# Altium PCB PHOTODIODE_V1.3.0.PcbDoc (part 1 of 3)
Units mm, origin at the board's own origin, x right, y up, seen from the top; angles counter-clockwise.
Board outline 86 x 86 mm, 4 copper layers (L1_TOP, L2_GND, L3_SIGNAL, L4_BOT); 134 components, 78 nets, 520 pads, 1315 vias.
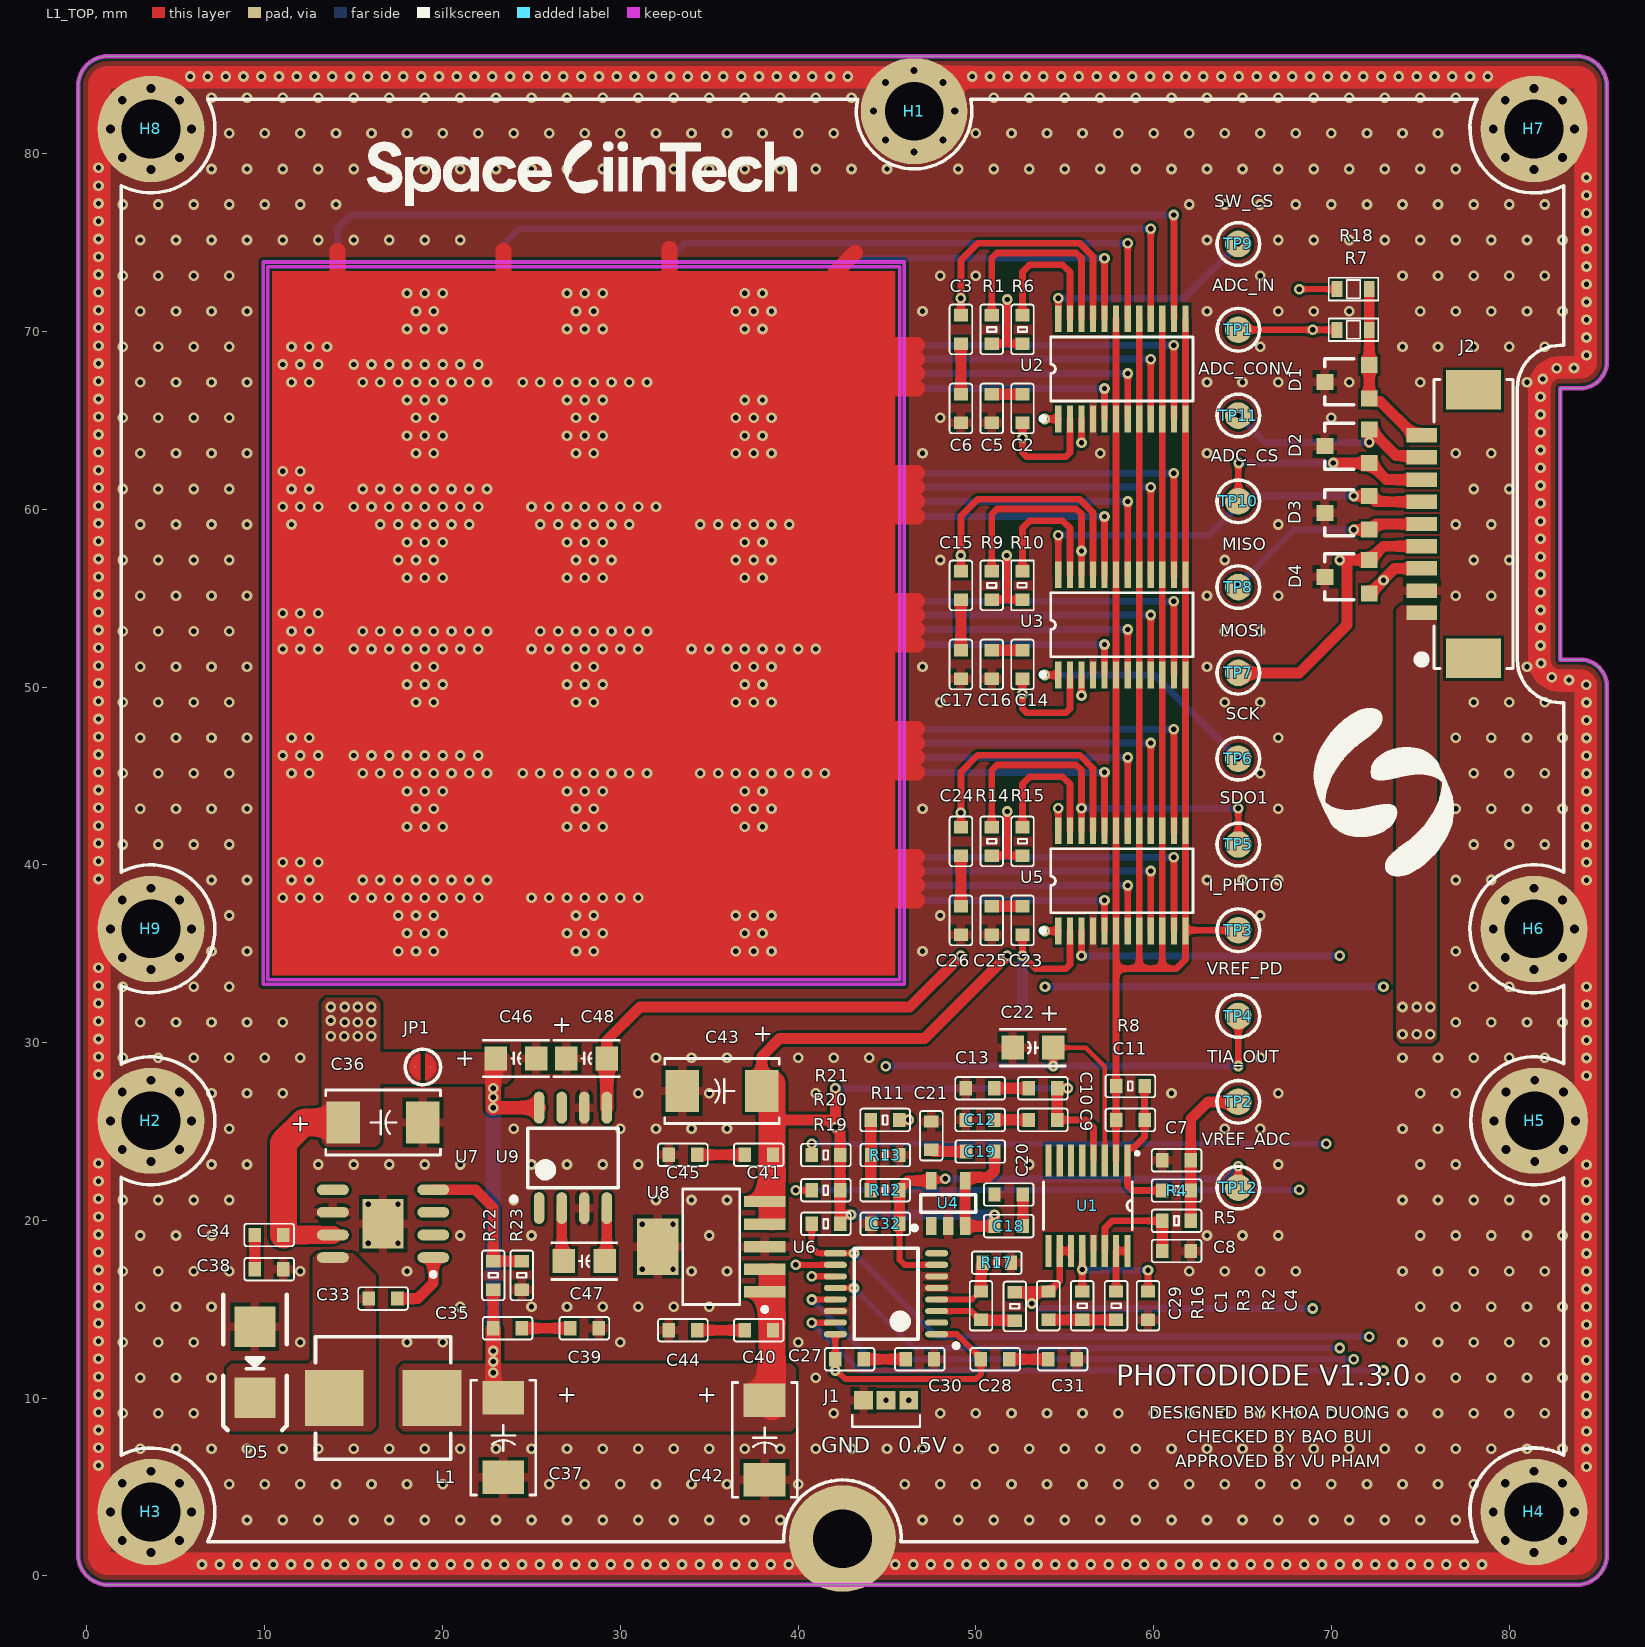
[diagram p0: L1_TOP view]
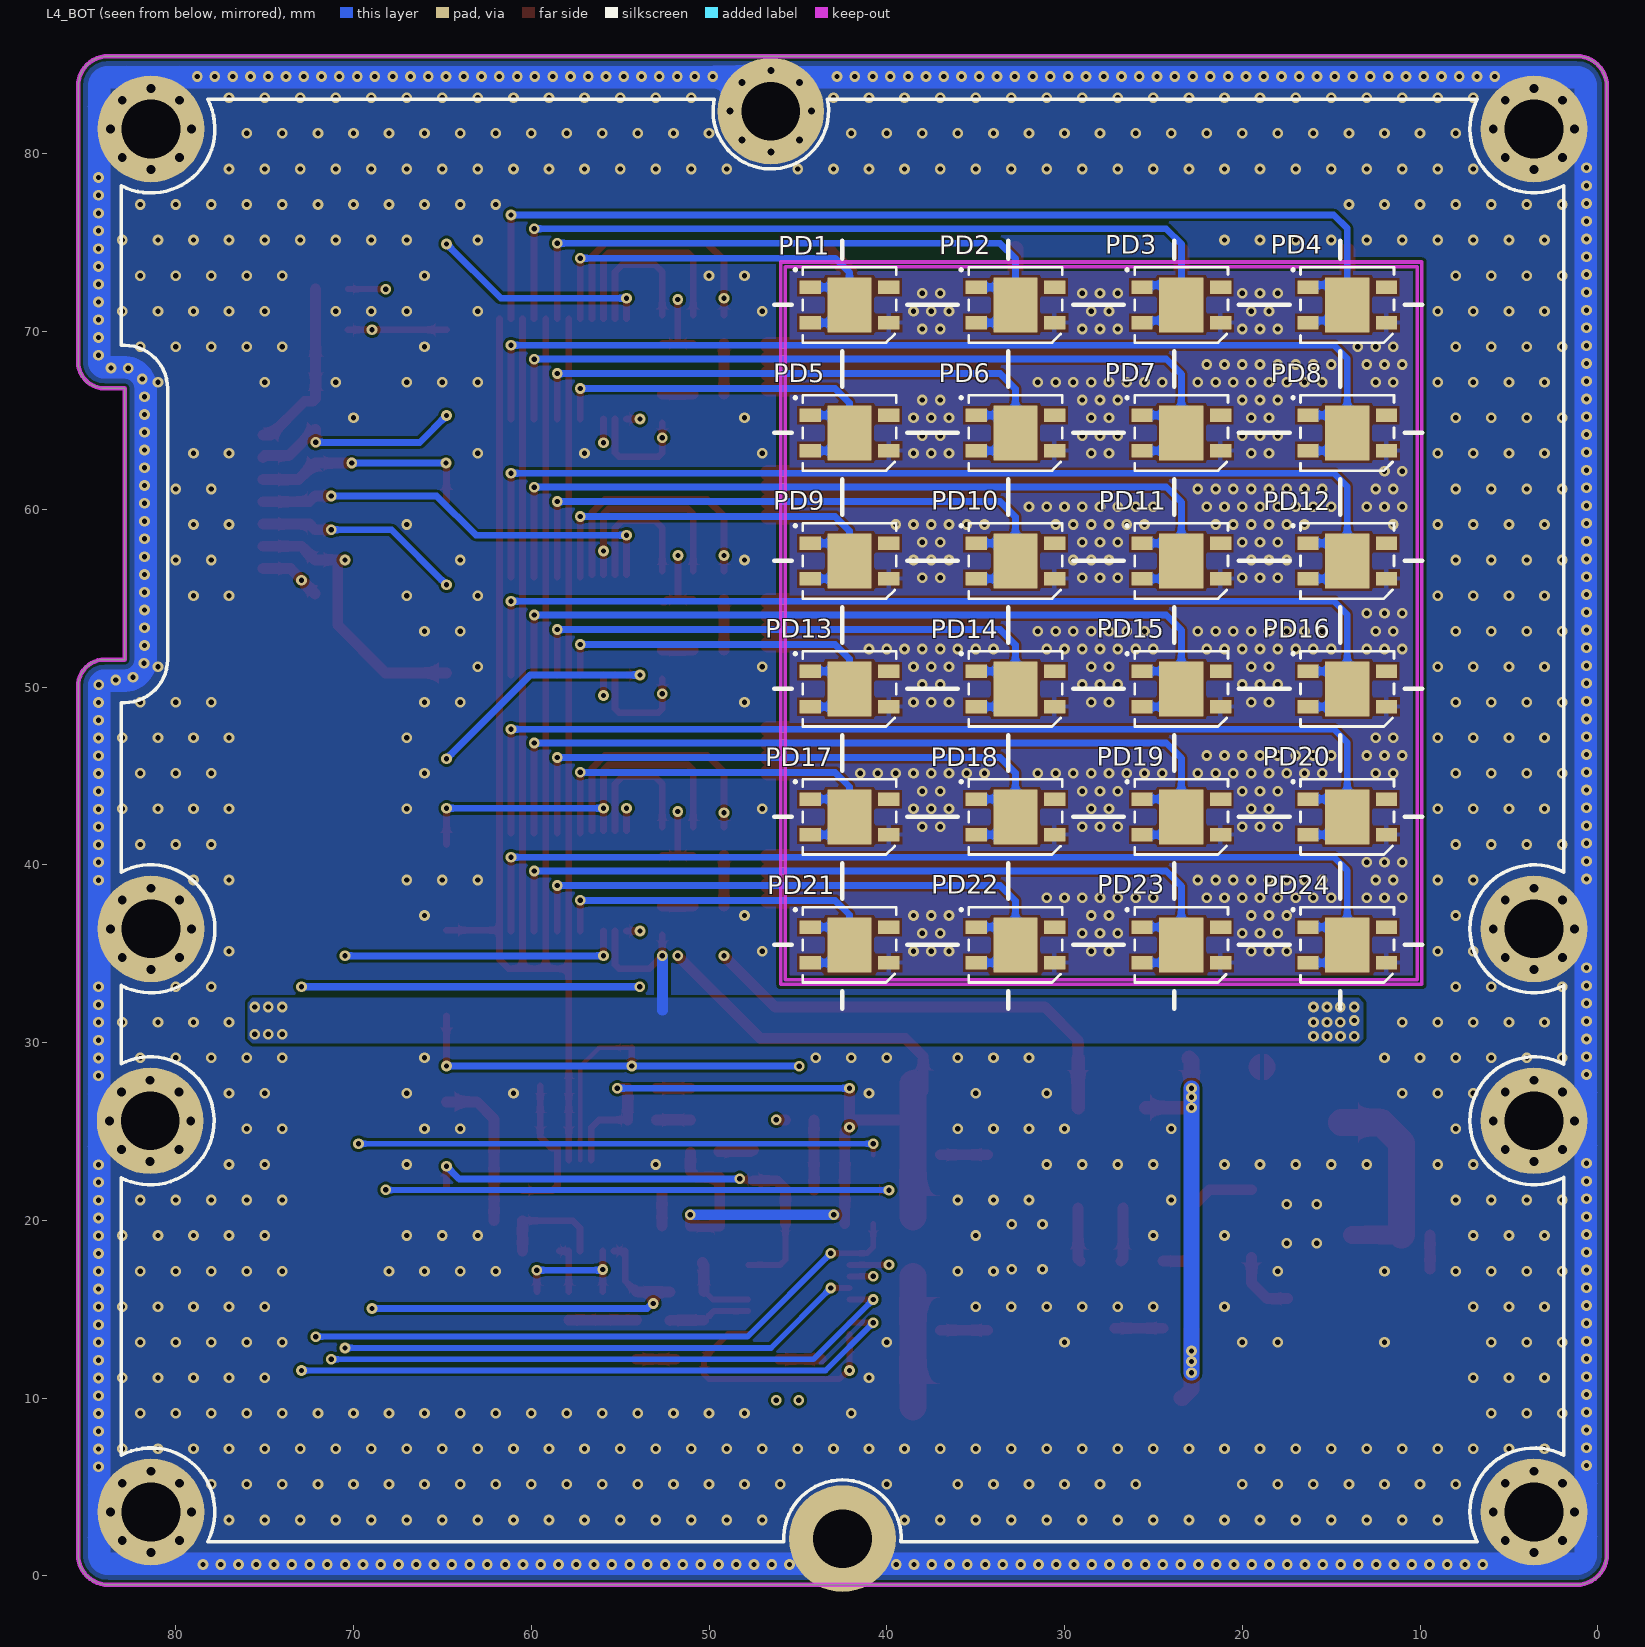
[diagram p1: L4_BOT view, seen from below]
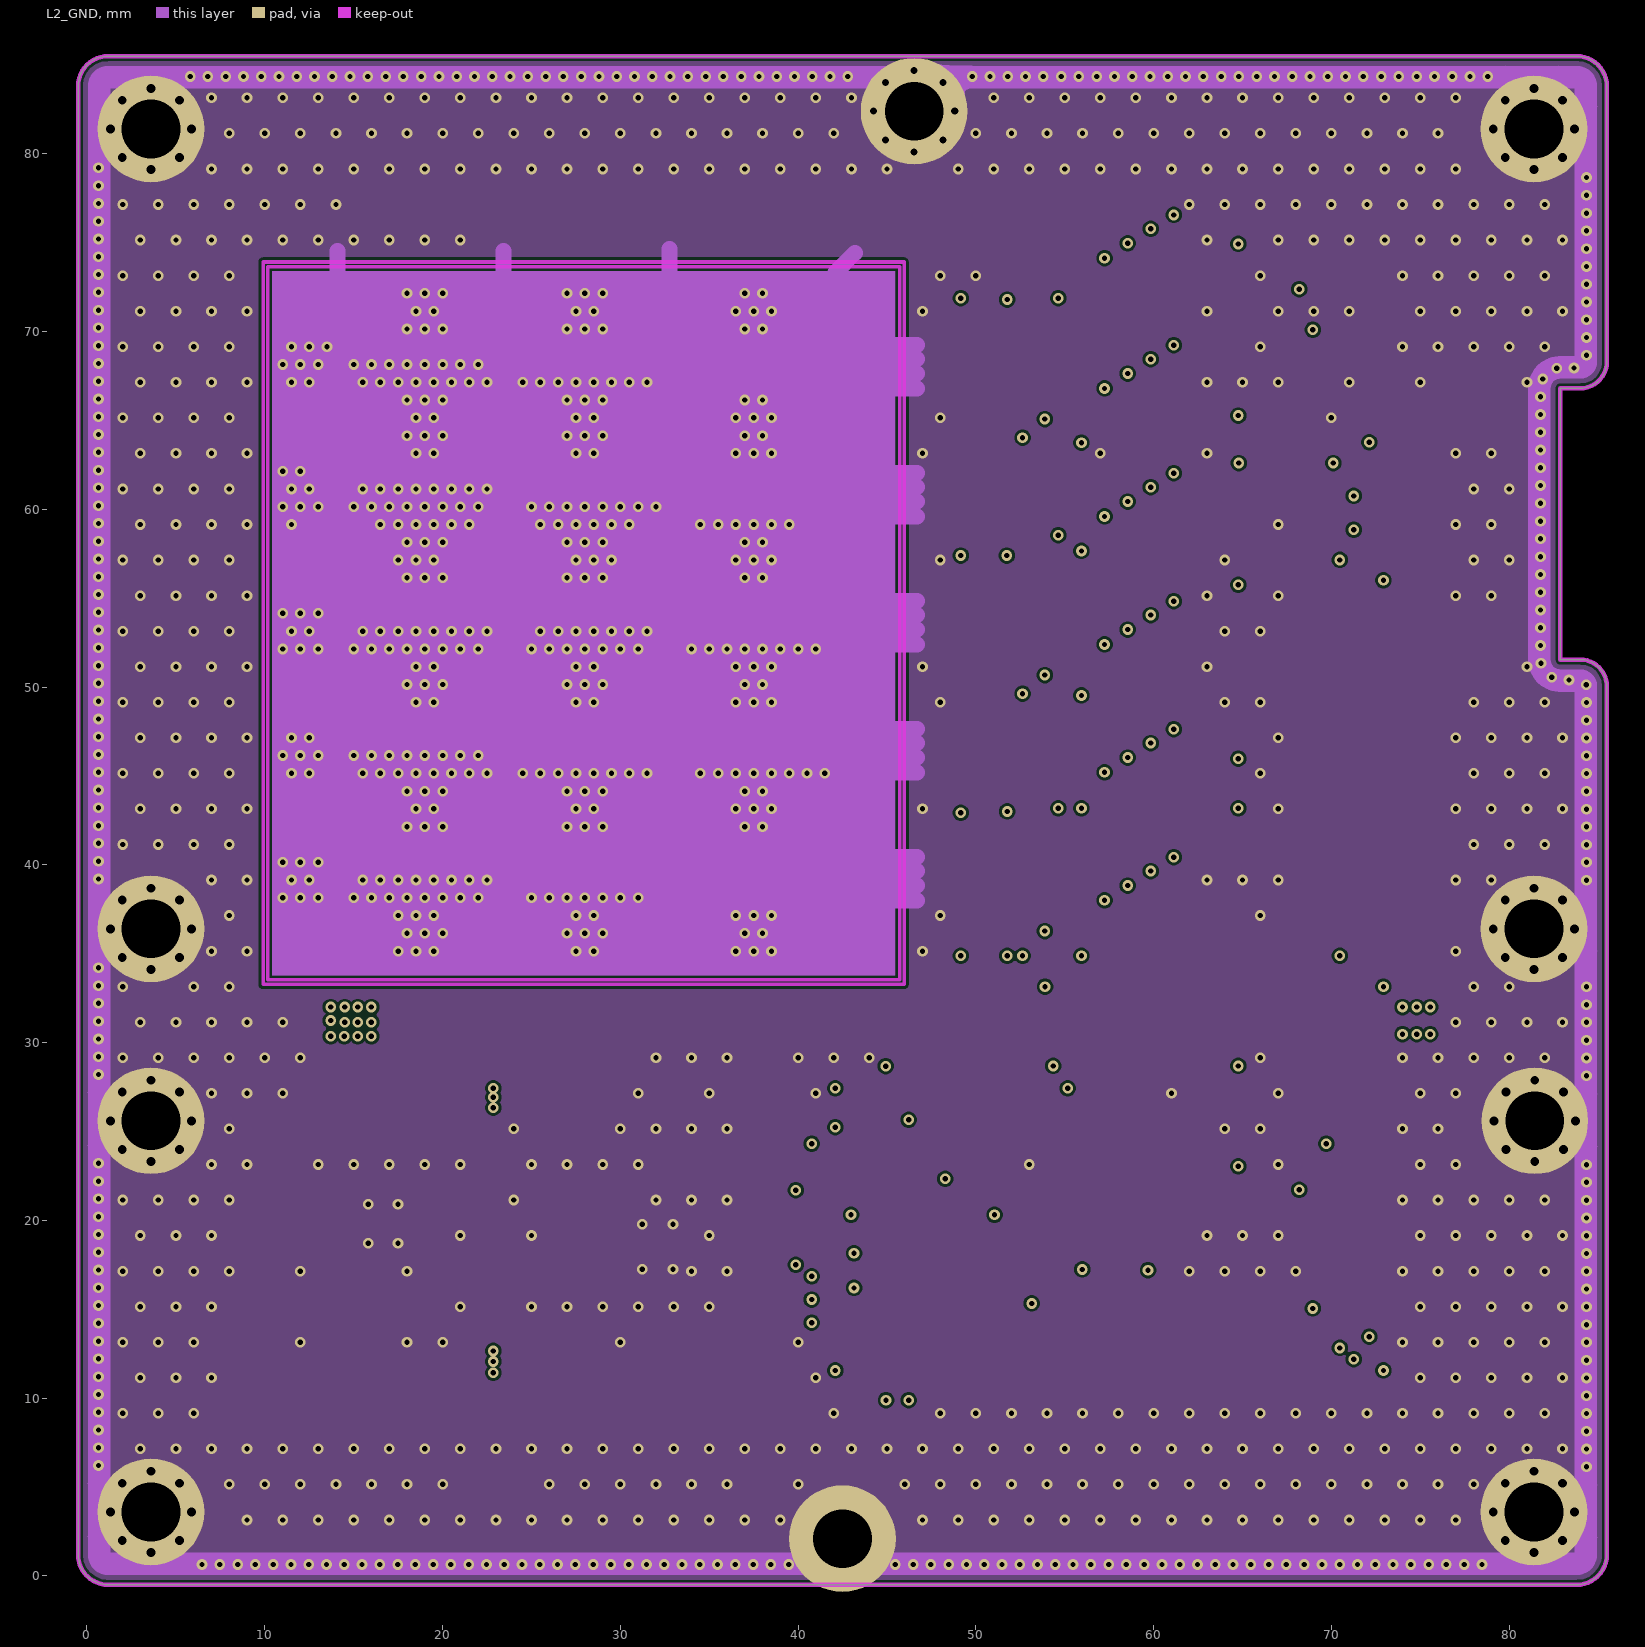
[diagram p2: L2_GND]
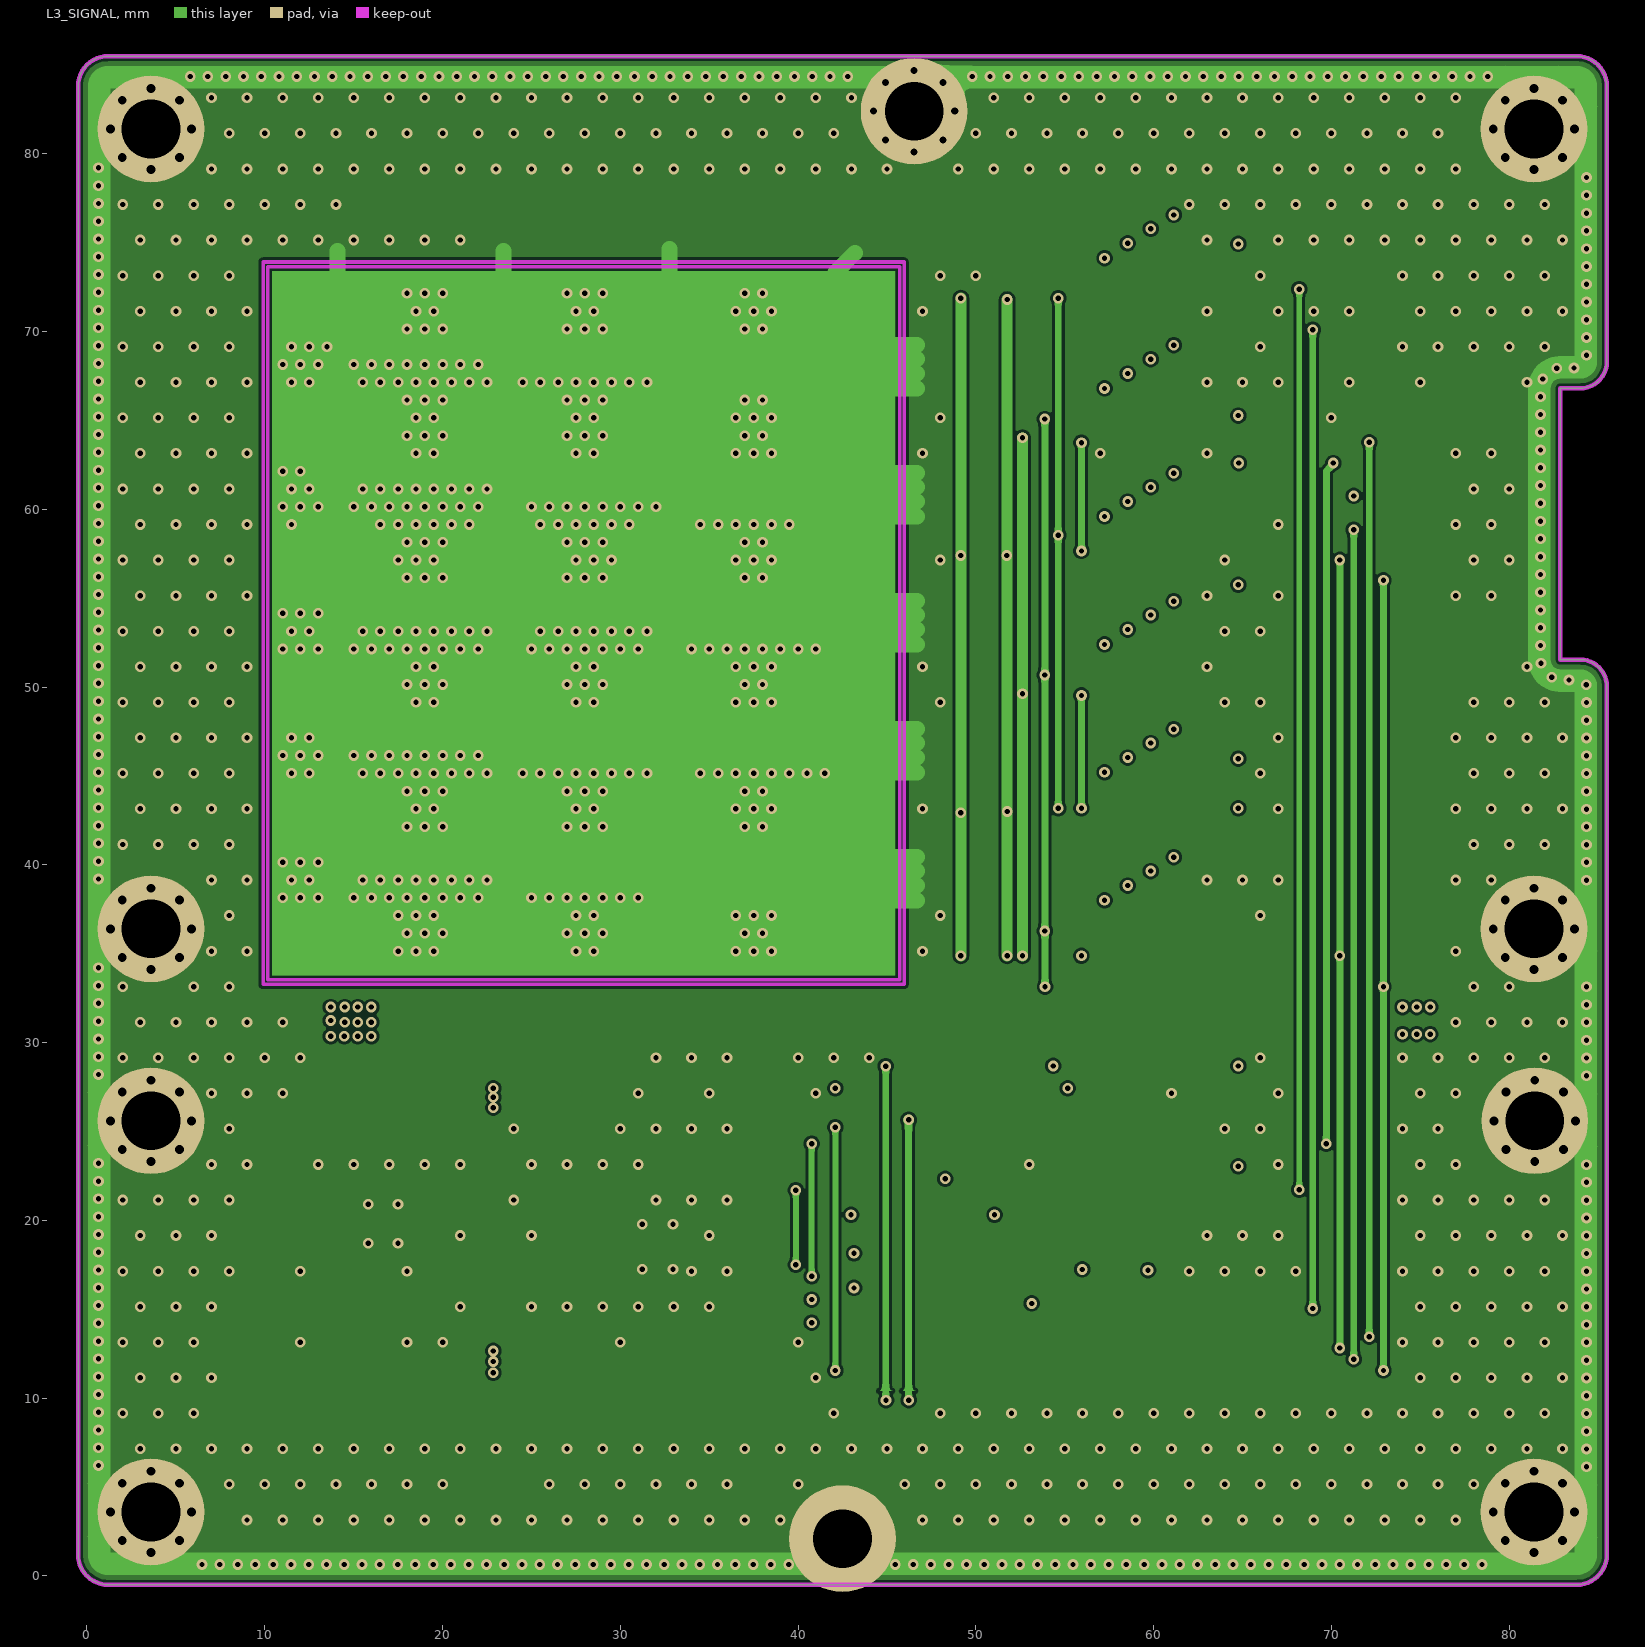
[diagram p3: L3_SIGNAL]
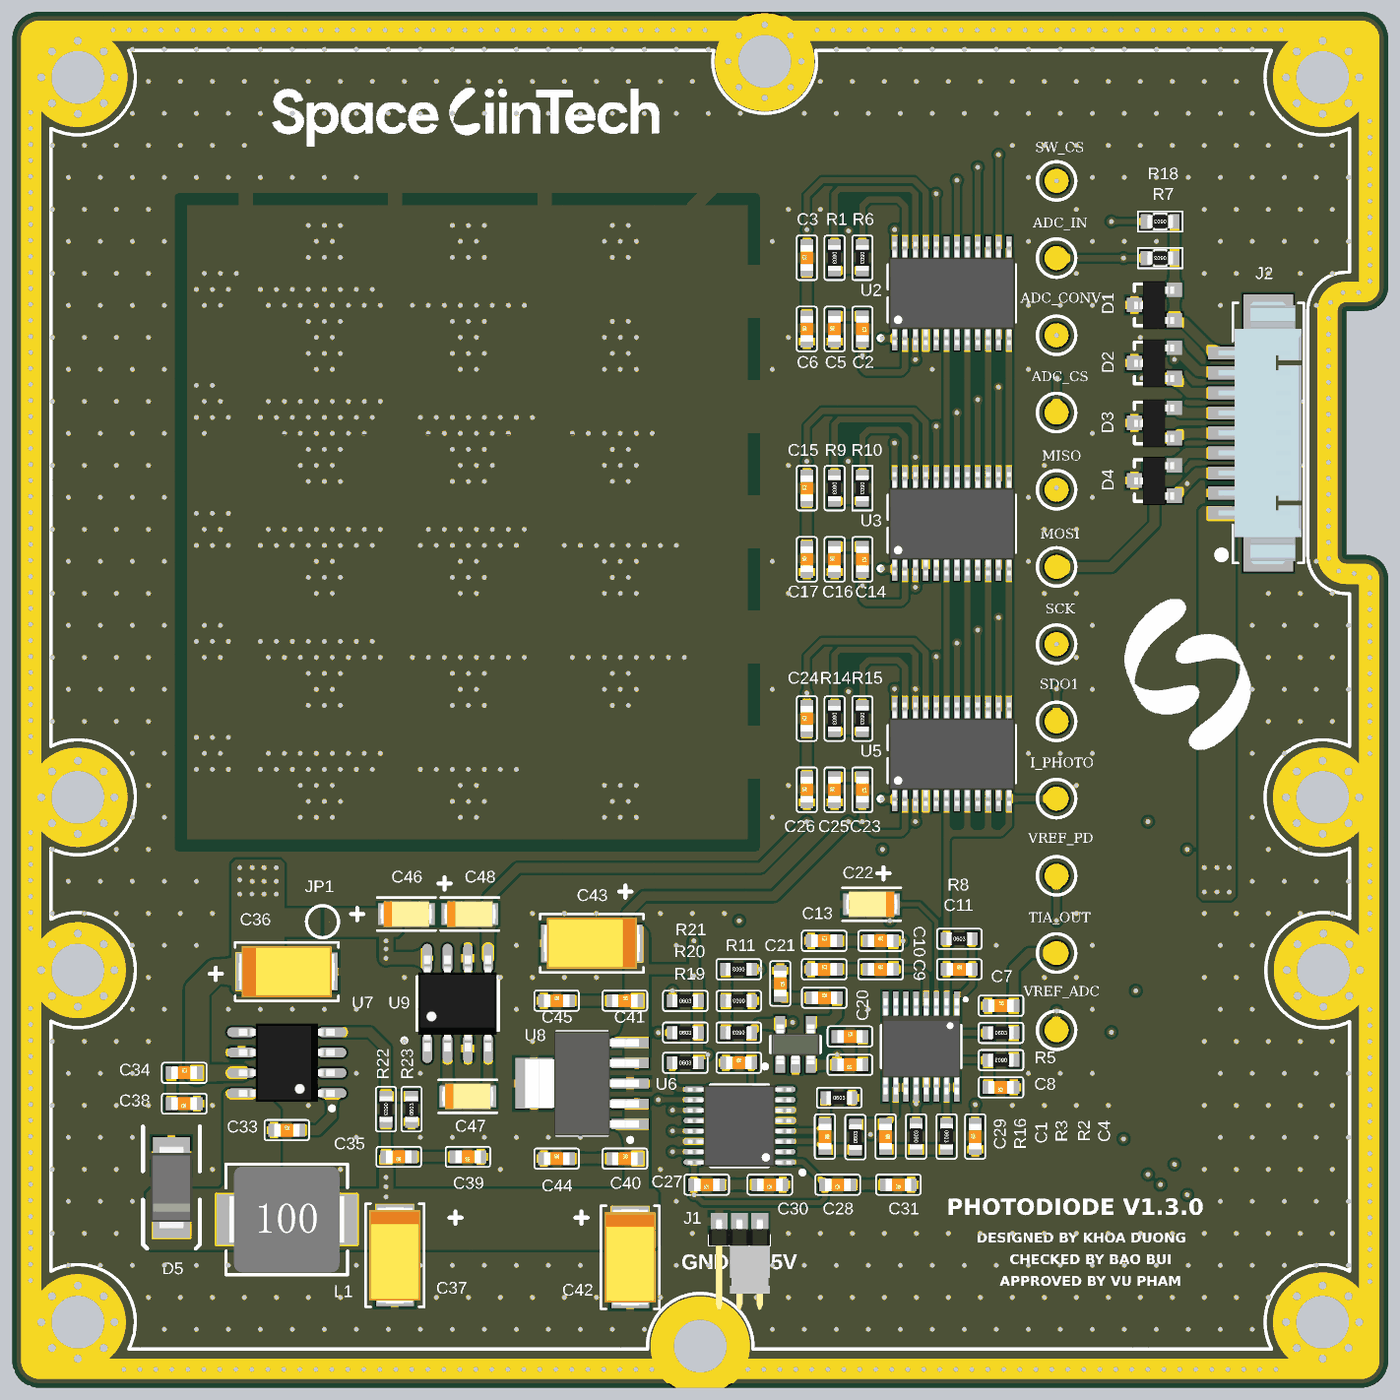
[diagram p6: 3D render of the assembled board from above, using the file's embedded part models]
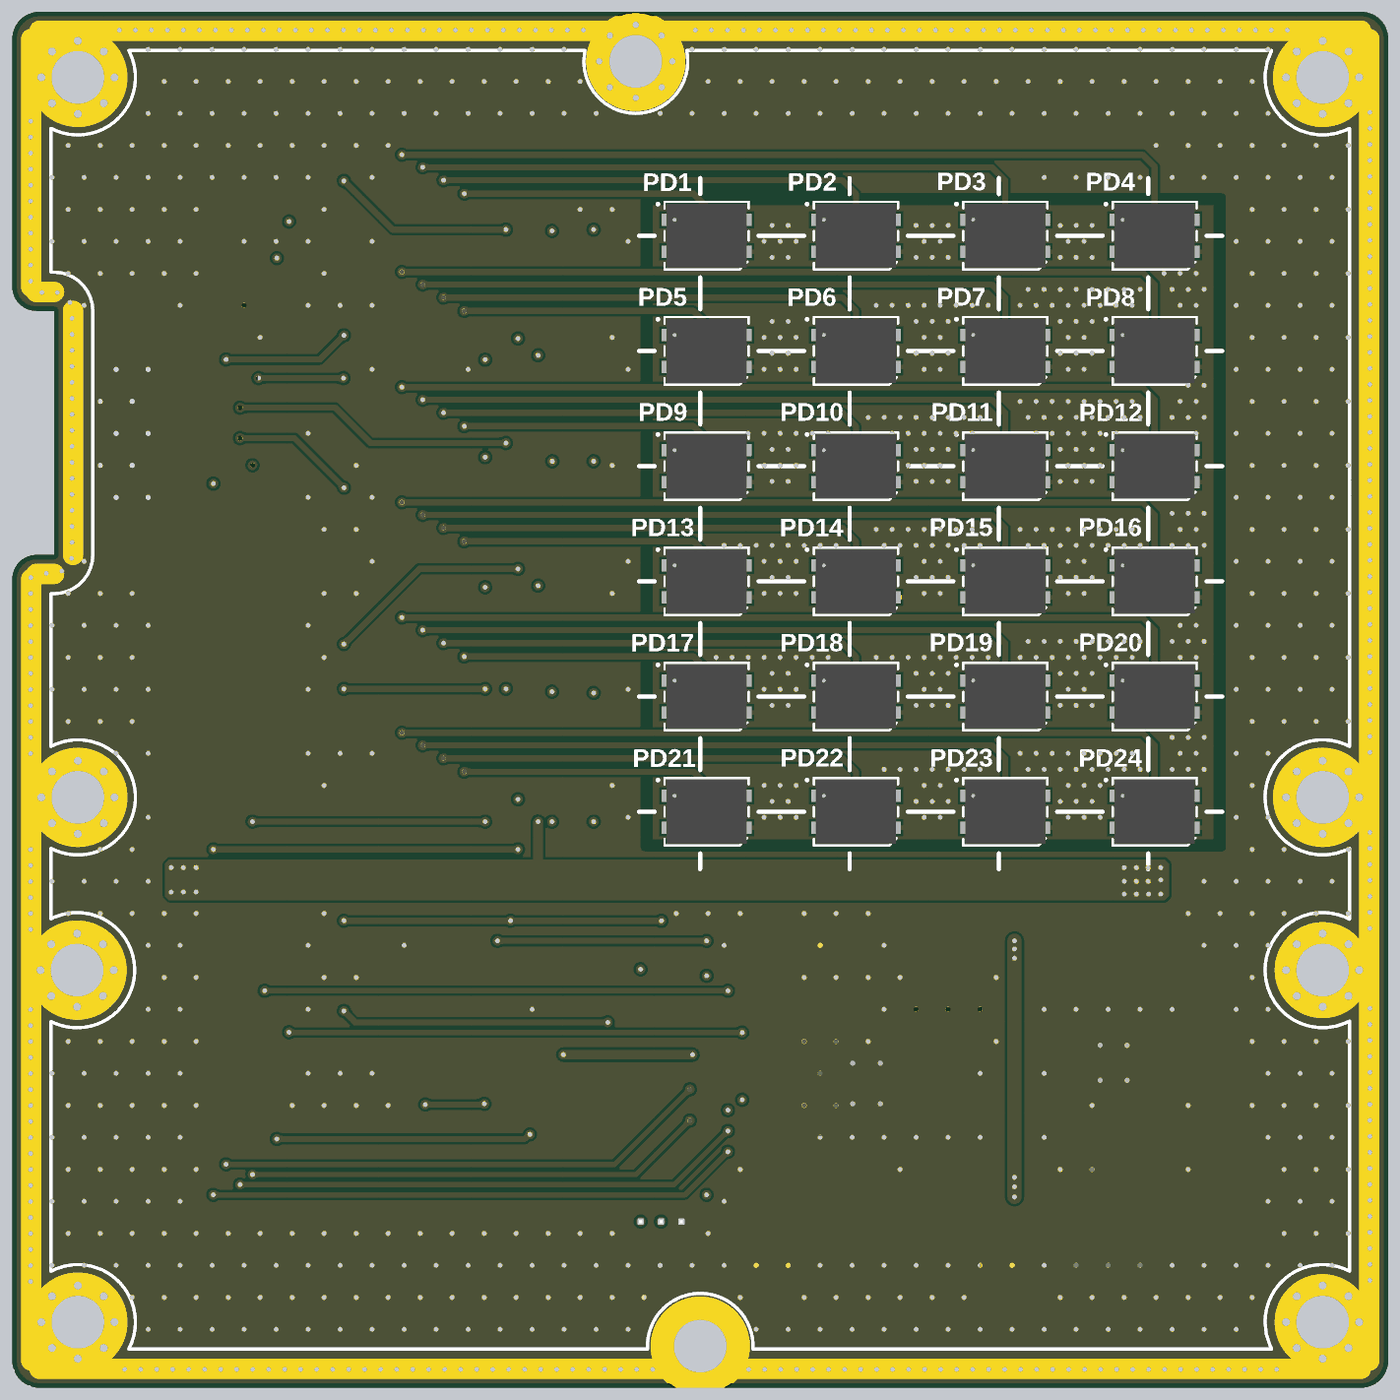
[diagram p7: 3D render of the assembled board from below, using the file's embedded part models]

## Layer stack, top to bottom
Top Solder: solder mask 0.0102, Solder Resist, Dk 3.5
L1_TOP: signal copper 0.0356
Dielectric 1: dielectric 0.32, FR-4, Dk 4.8
L2_GND: signal copper 0.0356
Dielectric2: dielectric 0.32, FR-4, Dk 4.8
L3_SIGNAL: signal copper 0.0356
Dielectric3: dielectric 0.32, FR-4, Dk 4.8
L4_BOT: signal copper 0.0356
Bottom Solder: solder mask 0.0102, Solder Resist, Dk 3.5

## Board outline
-0.5,1.2 -0.5,83.8 -0.5,83.806 cw(c1.2,83.8) 1.2,85.5 83.8,85.5 83.806,85.5 cw(c83.8,83.8) 85.5,83.8 85.5,68.306 85.5,68.301 cw(c84,68.306) 84,66.806 82.886,66.806 82.886,51.55 84,51.55 cw(c84,50.05) 85.5,50.05 85.5,1.2 85.5,1.196 cw(c83.8,1.2) 83.8,-0.5 1.2,-0.5 1.194,-0.5 cw(c1.2,1.2)

## Design rules (kind name [scope] priority, off if disabled: settings)
Clearance [All] p1: gap=0.15 ignorepadtopadclearanceinfootprint=TRUE
HoleSize [All] p1: absolutevalues=TRUE maxlimit=6 minlimit=0.025 maxpercent=80.000 minpercent=20.000
HoleToHoleClearance [All] p1: gap=0.12 allowstackedmicrovias=TRUE
MinimumSolderMaskSliver [All] p1: minsoldermaskwidth=0.14
PolygonConnect [All] p1: thpad.connectstyle=Relief thpad.reliefconductorwidth=0.5 thpad.reliefentries=4 thpad.polygonreliefangle="90 Angle" thpad.airgapwidth=0.2 thpad.conductorbypadedge=TRUE thpad.mindistance=0.381 thpad.enablemindistance=FALSE smdpad.connectstyle=Relief smdpad.reliefconductorwidth=0.5 smdpad.reliefentries=4 smdpad.polygonreliefangle="90 Angle" smdpad.airgapwidth=0.2 via.connectstyle=Direct via.reliefconductorwidth=0.254 via.reliefentries=4 via.polygonreliefangle="90 Angle" via.airgapwidth=0.254
RoutingVias [All] p1: holewidth=0.2 width=0.4 viastyle="Through Hole" minholewidth=0.2 minwidth=0.4 maxholewidth=0.6 maxwidth=0.9
SilkToSilkClearance [All] p1: silktosilkclearance=0.12
SilkToSolderMaskClearance [IsPad] p1: minsilkscreentomaskgap=0.12 clearancetoexposedcopper=TRUE
SolderMaskExpansion [All] p1: expansion=0.102 istentingtop=FALSE
SupplyNets "Schematic Supply Nets_7" [InNet('-5')] p1: voltage=0.000
SupplyNets "Schematic Supply Nets_6" [InNet('12V_EXP')] p2: voltage=0.000
SupplyNets "Schematic Supply Nets_5" [InNet('VREF_ADC')] p3: voltage=0.000
SupplyNets "Schematic Supply Nets_4" [InNet('+3.3')] p4: voltage=0.000
SupplyNets "Schematic Supply Nets_3" [InNet('VREF_PD')] p5: voltage=0.000
SupplyNets "Schematic Supply Nets_2" [InNet('GND')] p6: voltage=0.000
SupplyNets "Schematic Supply Nets" [InNet('+5')] p7: voltage=0.000
Width [All] p1: maxlimit=3 minlimit=0.254 preferedwidth=0.4
25 further rules are at their usual default settings.

## Classes and differential pairs
component class "POWER SWITCH AND LDO": C33 C34 C35 C36 C37 C38 C39 C40 C41 C42 C43 C44 C45 C46 C47 C48 D5 JP1 L1 R22 R23 U7 U8 U9
component class PHOTODIODE: C1 C2 C3 C4 C5 C6 C7 C8 C9 C10 C11 C12 C13 C14 C15 C16 C17 C18 C19 C20 C21 C22 C23 C24 C25 C26 J1 PD1 PD2 PD3 PD4 PD5 PD6 PD7 PD8 PD9 PD10 PD11 PD12 PD13 PD14 PD15 PD16 PD17 PD18 PD19 PD20 PD21 PD22 PD23 PD24 R1 R2 R3 R4 R5 R6 R7 R8 R9 R10 R11 R12 R13 R14 R15 TP1 TP2 TP3 TP4 TP5 U1 U2 U3 U4 U5
component class COMMUNICATION: C27 C28 C29 C30 C31 C32 D1 D2 D3 D4 H1 H2 H3 H4 H5 H6 H7 H8 H9 J2 R16 R17 R18 R19 R20 R21 TP6 TP7 TP8 TP9 TP10 TP11 TP12 U6

## Components (designator, comment, footprint, x,y, rotation, side; value= is the part's Value field where it differs from the comment)
C1 "10nF/25V" CN-SMD-0603 54.085,15.202 r270 top value=103
C2 "0.22uF/25V" CN-SMD-0603 52.632,65.676 r270 top value=103
C3 "0.22uF/25V" CN-SMD-0603 49.164,70.124 r90 top value=103
C4 "10nF/25V" CN-SMD-0603 59.69,15.202 r90 top value=103
C5 "0.22uF/25V" CN-SMD-0603 50.898,65.676 r90 top value=103
C6 "0.22uF/25V" CN-SMD-0603 49.164,65.676 r90 top value=103
C7 "470pF/25V" CN-SMD-0603 61.299,23.381 r0 top value=103
C8 "10nF/25V" CN-SMD-0603 61.299,18.275 r180 top value=103
C9 "0.22uF/25V" CN-SMD-0603 53.775,25.654 r0 top value=103
C10 "0.22uF/25V" CN-SMD-0603 53.775,27.432 r0 top value=103
C11 "470pF/25V" CN-SMD-0603 58.695,25.654 r0 top value=103
C12 "0.22uF/25V" CN-SMD-0603 50.246,25.654 r0 top value=103
C13 "0.22uF/25V" CN-SMD-0603 50.246,27.432 r0 top value=103
C14 "0.22uF/25V" CN-SMD-0603 52.632,51.276 r270 top value=103
C15 "0.22uF/25V" CN-SMD-0603 49.164,55.724 r90 top value=103
C16 "0.22uF/25V" CN-SMD-0603 50.898,51.276 r90 top value=103
C17 "0.22uF/25V" CN-SMD-0603 49.164,51.276 r90 top value=103
C18 "0.22uF/25V" CN-SMD-0603 51.854,19.68 r180 top value=103
C19 "0.22uF/25V" CN-SMD-0603 50.254,23.876 r0 top value=103
C20 "0.22uF/25V" CN-SMD-0603 51.854,21.455 r0 top value=103
C21 "0.22uF/25V" CN-SMD-0603 47.502,24.765 r270 top value=103
C22 "10uF 16V" CAP_TANT_1206 53.213,29.718 r180 top
C23 "0.22uF/25V" CN-SMD-0603 52.632,36.876 r270 top value=103
C24 "0.22uF/25V" CN-SMD-0603 49.164,41.324 r90 top value=103
C25 "0.22uF/25V" CN-SMD-0603 50.898,36.876 r90 top value=103
C26 "0.22uF/25V" CN-SMD-0603 49.164,36.876 r90 top value=103
C27 "0.22uF/25V" CN-SMD-0603 42.902,12.192 r180 top value=103
C28 "0.22uF/25V" CN-SMD-0603 51.092,12.192 r180 top value=103
C29 "470pF/25V" CN-SMD-0603 50.292,15.202 r270 top value=103
C30 "0.22uF/25V" CN-SMD-0603 46.852,12.192 r180 top value=103
C31 "0.22uF/25V" CN-SMD-0603 54.885,12.192 r180 top value=103
C32 "0.22uF/25V" CN-SMD-0603 44.911,19.812 r0 top value=103
C33 "10nF/25V" CN-SMD-0603 16.657,15.602 r0 top value=103
C34 "0.22uF/25V" CN-SMD-0603 10.249,19.181 r0 top value=103
C35 "0.22uF/25V" CN-SMD-0603 23.66,13.932 r180 top value=103
C36 "100uF/16V" "CAP TANT 2312" 16.657,25.508 r0 top
C37 "100uF/16V" "CAP TANT 2312" 23.419,7.779 r270 top
C38 "0.22uF/25V" CN-SMD-0603 10.249,17.253 r180 top value=103
C39 "0.22uF/25V" CN-SMD-0603 27.981,13.932 r180 top value=103
C40 "0.22uF/25V" CN-SMD-0603 37.793,13.822 r0 top value=103
C41 "0.22uF/25V" CN-SMD-0603 37.793,23.692 r0 top value=103
C42 "100uF 16V" "CAP TANT 2312" 38.125,7.652 r270 top
C43 "100uF 16V" "CAP TANT 2312" 35.722,27.281 r180 top
C44 "0.22uF/25V" CN-SMD-0603 33.522,13.824 r0 top value=103
C45 "0.22uF/25V" CN-SMD-0603 33.522,23.692 r0 top value=103
C46 "10uF 16V" CAP_TANT_1206 24.13,29.11 r0 top
C47 "10uF 16V" CAP_TANT_1206 27.975,17.71 r0 top
C48 "10uF 16V" CAP_TANT_1206 28.101,29.11 r0 top
D1 "S2305" SOT23-123 70.888,67.177 r90 top
D2 "S2305" SOT23-123 70.888,63.554 r90 top
D3 "S2305" SOT23-123 70.888,59.804 r90 top
D4 "S2305" SOT23-123 70.888,56.205 r90 top
D5 "SS54" DIO-SMD-A 9.449,12.014 r90 top value=1N5007
H1 "HOLD" "M3 - 6mm"#1 46.53,82.4 r0 top
H2 "HOLD" "M3 - 6mm"#2 3.6,25.6 r0 top
H3 "HOLD" "M3 - 6mm"#3 3.6,3.6 r0 top
H4 "HOLD" "M3 - 6mm"#4 81.4,3.6 r0 top
H5 "HOLD" "M3 - 6mm"#5 81.448,25.6 r0 top
H6 "HOLD" "M3 - 6mm"#5 81.4,36.4 r0 top
H7 "HOLD" "M3 - 6mm"#4 81.4,81.4 r0 top
H8 "HOLD" "M3 - 6mm"#4 3.6,81.4 r0 top
H9 "HOLD" "M3 - 6mm"#4 3.6,36.4 r0 top
J1 "Conn shunt" M50-3930342 44.952,8.887 r0 top
J2 "0532610971" 0532610971 78,59.175 r270 top
JP1 "JUMP2" Jump2 18.892,28.63 r90 top
L1 "15uH/3.5A" SRP7050TA 16.657,10.014 r0 top
PD1 "Photodiode" VEMD5080X01#1 42.504,71.5 r180 bottom
PD2 "Photodiode" VEMD5080X01#1 33.17,71.5 r180 bottom
PD3 "Photodiode" VEMD5080X01#1 23.836,71.5 r180 bottom
PD4 "Photodiode" VEMD5080X01#1 14.502,71.5 r180 bottom
PD5 "Photodiode" VEMD5080X01#1 42.504,64.3 r180 bottom
PD6 "Photodiode" VEMD5080X01#1 33.17,64.3 r180 bottom
PD7 "Photodiode" VEMD5080X01#1 23.836,64.3 r180 bottom
PD8 "Photodiode" VEMD5080X01#1 14.502,64.3 r180 bottom
PD9 "Photodiode" VEMD5080X01#1 42.504,57.1 r180 bottom
PD10 "Photodiode" VEMD5080X01#1 33.17,57.1 r180 bottom
PD11 "Photodiode" VEMD5080X01#1 23.836,57.1 r180 bottom
PD12 "Photodiode" VEMD5080X01#1 14.502,57.1 r180 bottom
PD13 "Photodiode" VEMD5080X01#1 42.504,49.9 r180 bottom
PD14 "Photodiode" VEMD5080X01#2 33.17,49.9 r180 bottom
PD15 "Photodiode" VEMD5080X01#1 23.836,49.9 r180 bottom
PD16 "Photodiode" VEMD5080X01#1 14.502,49.9 r180 bottom
PD17 "Photodiode" VEMD5080X01#1 42.504,42.7 r180 bottom
PD18 "Photodiode" VEMD5080X01#1 33.17,42.7 r180 bottom
PD19 "Photodiode" VEMD5080X01#1 23.836,42.7 r180 bottom
PD20 "Photodiode" VEMD5080X01#1 14.502,42.7 r180 bottom
PD21 "Photodiode" VEMD5080X01#1 42.504,35.5 r180 bottom
PD22 "Photodiode" VEMD5080X01#1 33.17,35.5 r180 bottom
PD23 "Photodiode" VEMD5080X01#1 23.836,35.5 r180 bottom
PD24 "Photodiode" VEMD5080X01#1 14.502,35.5 r180 bottom
R1 "4.7K 1%" RES-SMD-0603#1 50.898,70.124 r270 top
R2 "10K 1%" RES-SMD-0603#1 57.895,15.202 r270 top
R3 "10K 1%" RES-SMD-0603#1 55.99,15.202 r90 top
R4 "51R 1%" RES-SMD-0603#1 61.299,21.679 r0 top
R5 "10K 1%" RES-SMD-0603#1 61.299,19.977 r180 top
R6 "4.7K 1%" RES-SMD-0603#1 52.632,70.124 r270 top
R7 "0R/DNP" RES-SMD-0603#2 71.249,70.104 r180 top
R8 "330k 1%" RES-SMD-0603#1 58.695,27.559 r0 top
R9 "4.7K 1%" RES-SMD-0603#1 50.898,55.724 r270 top
R10 "4.7K 1%" RES-SMD-0603#1 52.632,55.724 r270 top
R11 "10K 1%/DNP" RES-SMD-0603#1 44.902,25.654 r180 top
R12 "10K 1%/DNP" RES-SMD-0603#1 44.902,21.699 r180 top
R13 "2K 1%/DNP" RES-SMD-0603#1 44.911,23.677 r180 top
R14 "4.7K 1%" RES-SMD-0603#1 50.898,41.324 r270 top
R15 "4.7K 1%" RES-SMD-0603#1 52.632,41.324 r270 top
R16 "22R 1%" RES-SMD-0603#1 52.197,15.165 r90 top
R17 "22R 1%" RES-SMD-0603#1 51.181,17.624 r0 top
R18 "0R" RES-SMD-0603#2 71.249,72.39 r180 top
R19 "4.7K 1%" RES-SMD-0603#1 41.567,19.812 r0 top
R20 "4.7K 1%" RES-SMD-0603#1 41.567,21.699 r0 top
R21 "4.7K 1%" RES-SMD-0603#1 41.567,23.677 r0 top
R22 "10K 1%" RES-SMD-0603#1 22.86,16.91 r270 top
R23 "3.24K 0.1%" RES-SMD-0603#1 24.46,16.91 r90 top
TP1 "Test_Point" TESTPOINT#1 64.77,70.104 r180 top
TP2 "Test_Point" TESTPOINT#1 64.77,26.67 r180 top
TP3 "Test_Point" TESTPOINT#1 64.77,36.322 r180 top
TP4 "Test_Point" TESTPOINT#2 66.43,31.496 r180 top
TP5 "Test_Point" TESTPOINT#1 64.77,41.148 r0 top
TP6 "Test_Point" TESTPOINT#1 64.77,45.974 r180 top
TP7 "Test_Point" TESTPOINT#1 64.77,50.8 r180 top
TP8 "Test_Point" TESTPOINT#1 64.77,55.626 r180 top
TP9 "Test_Point" TESTPOINT#3 65.812,74.93 r90 top
TP10 "Test_Point" TESTPOINT#1 64.77,60.452 r180 top
TP11 "Test_Point" TESTPOINT#1 64.77,65.278 r180 top
TP12 "Test_Point" TESTPOINT#1 64.77,21.844 r180 top
U1 "OPA4340" SSOP16 56.308,20.828 r270 top
U2 "ADG1414BRUZ" TSSOP24 58.22,67.9 r90 top
U3 "ADG1414BRUZ" TSSOP24 58.22,53.5 r90 top
U4 "REF1930" SOT23-5 48.452,20.955 r90 top
U5 "ADG1414BRUZ" TSSOP24 58.22,39.1 r90 top
U6 "ADS8329" TSSOP16 44.952,15.875 r180 top
U7 "TPS5430DDAR" HSOP8 16.657,19.816 r180 top
U8 "TPS7A4533DCQR" SOT223-6 35.115,18.521 r180 top
U9 "ICL7660" SO8 27.34,23.519 r90 top

## Footprints (in the part's own frame and the unit in brackets; to place one, negate y for a bottom-side part, rotate by r counter-clockwise, add the part's x,y. Pads: shape width x height; smd on the part's side, far side on the other; paste and mask are expansions set on the pad)
0532610971 [mil] "CONN HEADER SMD R/A 9POS 1.25MM"
  rect 32x67 smd: 1(196.85,-114.35) 2(147.64,-114.35) 3(98.43,-114.35) 4(49.21,-114.35) 5(0,-114.35) 6(-49.21,-114.35) 7(-98.43,-114.35) 8(-147.64,-114.35) 9(-196.85,-114.35)
  rect 87x122 smd: 10(-297.24,-0.18) 11(297.24,-0.18)
  silkscreen extent -320,-123 320,88, body extent -323,-122 323,83, height 134
"CAP TANT 2312" [mil]
  rect 74x93 smd paste+0 mask+1.97: 1(-88,0) 2(88,0)
  silkscreen extent -127,-72 127,72, body extent -118,-63 118,63, height 110
CAP_TANT_1206 [mil]
  rect 49.98x53 smd paste+0 mask+0: 1(-45.01,0) 2(45.01,0)
  silkscreen extent -72,-41 72,41, body extent -63,-31 63,31, height 71
CN-SMD-0603 [mm]
  rect 0.7x0.8 smd: 1(-0.8,0) 2(0.8,0)
  silkscreen extent -1.4,-0.64 1.4,0.64, body extent -0.8,-0.4 0.8,0.4, height 0.3
DIO-SMD-A [mm]
  rect 2.286x2.3 smd: 1(2,0) 2(-2,0)
  silkscreen extent -3.81,-1.78 3.81,1.78, body extent -2.6,-1.3 2.6,1.3, height 2.4
HSOP8 [mm] "SOIC, 8-Leads, Body 4.9x3.9mm, Pitch 1.27mm, IPC High Density"
  oval 1.8x0.6 smd: 1(-2.825,1.905) 2(-2.825,0.635) 3(-2.825,-0.635) 4(-2.825,-1.905) 5(2.825,-1.905) 6(2.825,-0.635) 7(2.825,0.635) 8(2.825,1.905)
  rect 2.3x2.8 smd: 9(0,0)
  silkscreen extent -2.95,2.73 -2.7,2.98, body extent -2.99,-2.45 3,2.45, height 1.6
Jump2 [mil]
  round 1 smd paste-99999 mask+0: 1(0,17.33) 2(0,-17.32)
  L1_TOP region: 29.08,-5.12 23.68,-17.62 13.25,-26.37 0,-29.52 -13.25,-26.37 -23.68,-17.62 -29.08,-5.12 -29.08,-5.12
  L1_TOP region: -29.08,5.13 -23.68,17.64 -13.25,26.39 0,29.53 13.25,26.39 23.68,17.64 29.08,5.13 29.08,5.13
  silkscreen extent -39,-39 39,39
"M3 - 6mm"#1 [mm] "3.3 x 6mm"
  round 0.7 hole 0.4: 1(-2.286,0) 1(-1.616,-1.616) 1(-1.616,1.616) 1(0,-2.286) 1(0,2.286) 1(1.616,-1.616) 1(1.616,1.616) 1(2.286,0)
  round 6 hole 3.3 mask+0.102: 1(0,0)
"M3 - 6mm"#2 [mm] "3.3 x 6mm"
  round 0.8 hole 0.5 mask+0: 1(-2.286,0) 1(-1.616,-1.616) 1(0,2.286)
  round 0.8 hole 0.5: 1(-1.616,1.616) 1(0,-2.286) 1(1.616,-1.616) 1(1.616,1.616) 1(2.286,0)
  round 6 hole 3.3 mask+0: 1(0,0)
"M3 - 6mm"#3 [mm] "3.3 x 6mm"
  round 0.8 hole 0.5: 1(-2.286,0) 1(-1.616,-1.616) 1(-1.616,1.616) 1(0,-2.286) 1(0,2.286) 1(1.616,-1.616) 1(1.616,1.616) 1(2.286,0)
  round 6 hole 3.3 mask+0: 1(0,0)
"M3 - 6mm"#4 [mm] "3.3 x 6mm"
  round 0.8 hole 0.5: 1(-2.286,0) 1(-1.616,-1.616) 1(-1.616,1.616) 1(0,-2.286) 1(0,2.286) 1(1.616,-1.616) 1(1.616,1.616) 1(2.286,0)
  round 6 hole 3.3: 1(0,0)
"M3 - 6mm"#5 [mm] "3.3 x 6mm"
  round 0.8 hole 0.5: 1(-2.286,0) 1(-1.616,-1.616) 1(-1.616,1.616) 1(0,-2.286) 1(0,2.286) 1(1.616,1.616)
  round 6 hole 3.3: 1(0,0)
  round 0.8 hole 0.5 mask+0: 1(1.616,-1.616) 1(2.286,0)
M50-3930342 [mm]
  rect 1.05x1.05 smd mask+0: 1(-1.27,1) 2(0,1) 3(1.27,1)
  silkscreen extent -1.91,-0.5 1.91,0.15, body extent -1.91,-4.51 1.91,1.19, height 2.05
RES-SMD-0603#1 [mm]
  rect 0.7x0.8 smd: 1(-0.8,0) 2(0.8,0)
  silkscreen extent -1.4,-0.64 1.4,0.64, body extent -0.8,-0.4 0.8,0.4, height 0.43
RES-SMD-0603#2 [mm]
  rect 0.6x0.9 smd: 1(-0.889,0) 2(0.927,0)
  silkscreen extent -1.4,-0.64 1.4,0.64, body extent -0.8,-0.4 0.8,0.4, height 0.43
SO8 [mm] "SOIC, 8-Leads, Body 4.9x3.9mm, Pitch 1.27mm, IPC High Density"
  oval 1.8x0.6 smd: 1(-2.825,1.905) 2(-2.825,0.635) 3(-2.825,-0.635) 4(-2.825,-1.905) 5(2.825,-1.905) 6(2.825,-0.635) 7(2.825,0.635) 8(2.825,1.905)
  silkscreen extent -2.43,-2.55 1.68,3.46, body extent -2.99,-2.45 3,2.45, height 1.6
SOT23-5 [mm] "SOT23-5"
  rect 1x0.6 smd: 1(-1.275,0.95) 2(-1.275,0) 3(-1.275,-0.95) 4(1.275,-0.95) 5(1.275,0.95)
  silkscreen extent -1.5,-1.55 0.5,2.02, body extent -1.25,-1.5 1.25,1.5, height 1.1
SOT23-123 [mm] "SOT23, 1=bottom-left, 2=top, 3=bottom-right"
  rect 0.9x0.95 smd: 1(-0.95,-1.25) 2(0,1.25)
  rect 0.9x0.95 smd mask+0: 3(0.95,-1.25)
  silkscreen extent -1.3,-0.38 1.3,1.25, body extent -1.52,-1.23 1.48,1.27, height 1.06
SOT223-6 [mm]
  rect 2.346x0.632 smd paste+0 mask+0.05: 1(-3.01,2.54) 2(-3.01,1.27) 3(-3.01,0) 4(-3.01,-1.27) 5(-3.01,-2.54)
  rect 2.346x3.172 smd paste+0 mask+0.05: 6(3.01,0)
  silkscreen extent -3.14,-3.25 1.6,3.65, body extent -3.55,-3.25 3.55,3.25, height 1.66
SRP7050TA [mm] "Precision Wire Wound Inductor, 2-Leads, Body 7.30x6.60mm, IPC Medium Density"
  rect 3.3x3.15 smd: 1(-2.75,0) 2(2.75,0)
  silkscreen extent -3.8,-3.45 3.8,3.45, body extent -3.6,-3.3 3.6,3.3, height 4.91
SSOP16 [mm]
  rect 1.8x0.35 smd mask+0.05: 1(-2.553,2.222) 2(-2.553,1.587) 3(-2.553,0.952) 4(-2.553,0.317) 5(-2.553,-0.318) 6(-2.553,-0.953) 7(-2.553,-1.588) 8(-2.553,-2.223) 9(2.553,-2.222) 10(2.553,-1.587) 11(2.553,-0.952) 12(2.553,-0.317) 13(2.553,0.318) 14(2.553,0.953) 15(2.553,1.588) 16(2.553,2.223)
  silkscreen extent -3,-2.5 1.33,2.84, body extent -3,-2.45 3,2.45, height 1.75
TESTPOINT#1 [mm]
  round 1.5 smd paste-2539.97: 1(0,0)
  silkscreen extent -1.2,-1.2 1.2,1.2
TESTPOINT#2 [mm]
  round 1.5 smd paste-2539.97: 1(1.66,0)
  silkscreen extent 0.46,-1.2 2.86,1.2
TESTPOINT#3 [mm]
  round 1.5 smd paste-2539.97: 1(0,1.042)
  silkscreen extent -1.2,-0.16 1.2,2.24
TSSOP16 [mm] "TSSOP, 16-Leads, Body 5.10x4.40mm, Pitch 0.65mm, IPC High Density"
  oval 1.3x0.35 smd mask+0.05: 1(-2.85,2.275) 2(-2.85,1.625) 3(-2.85,0.975) 4(-2.85,0.325) 5(-2.85,-0.325) 6(-2.85,-0.975) 7(-2.85,-1.625) 8(-2.85,-2.275) 9(2.85,-2.275) 10(2.85,-1.625) 11(2.85,-0.975) 12(2.85,-0.325) 13(2.85,0.325) 14(2.85,0.975) 15(2.85,1.625) 16(2.85,2.275)
  silkscreen extent -4.07,-2.55 1.8,3.05, body extent -3.23,-2.53 3.23,2.57, height 1.25
TSSOP24 [mm] "TSSOP, 24-Leads, Body 7.80x4.40mm, Pitch 0.65mm, IPC High Density"
  rect 1.5x0.35 smd mask+0.08: 1(-2.819,3.575) 2(-2.819,2.925) 3(-2.819,2.275) 4(-2.819,1.625) 5(-2.819,0.975) 6(-2.819,0.325) 7(-2.819,-0.325) 8(-2.819,-0.975) 9(-2.819,-1.625) 10(-2.819,-2.275) 11(-2.819,-2.925) 12(-2.819,-3.575) 13(2.819,-3.575) 14(2.819,-2.925) 15(2.819,-2.275) 16(2.819,-1.625) 17(2.819,-0.975) 18(2.819,-0.325) 19(2.819,0.325) 20(2.819,0.975) 21(2.819,1.625) 22(2.819,2.275) 23(2.819,2.925) 24(2.819,3.575)
  silkscreen extent -2.91,-4 1.8,4.56, body extent -3.23,-3.95 3.23,3.95, height 1.25
VEMD5080X01#1 [mil]
  rect 47x30 smd paste+0 mask+0: 1(102.83,-39.37) 2(-71.17,-39.37) 2(-71.17,39.37) 3(102.83,39.37)
  rect 98x122 smd paste+0 mask+0: 2(15.83,0)
  silkscreen extent -107,-84 119,84, body extent -83,-79 114,79, height 41
VEMD5080X01#2 [mil]
  rect 47x30 smd paste+0 mask+1.97: 1(102.83,-39.37) 2(-71.17,-39.37) 2(-71.17,39.37) 3(102.83,39.37)
  rect 98x122 smd paste+0 mask+1.97: 2(15.83,0)
  silkscreen extent -107,-84 119,84, body extent -83,-79 114,79, height 41

## Part data
C1 C2 C3 C4 C5 C6 C7 C8 C9 C10 C11 C12 C13 C14 C15 C16 C17 C18 C19 C20 C21 C23 C24 C25 C26 C27 C28 C29 C30 C31 C32 C33 C34 C35 C38 C39 C40 C41 C44 C45: library part CM, "0603"
C22 C36 C37 C42 C43 C46 C47 C48: library part CN-ALU-SMD, "Polarized Capacitor (Axial)", LatestRevisionDate=17-Jul-2002, LatestRevisionNote="Re-released for DXP Platform.", PackageReference=POLAR0.8, Published=8-Jun-2000, Publisher="Altium Limited"
D1 D2 D3 D4: library part S2303, "TVS DIODE 5VWM 10.8VC SOT23, P/N:   / S2305"
D5: library part "Diode SMD", "DIODE SCHOTTKY 40V 5A SMA", Code - JEDEC=DO-214-AB, Published=8-Jun-2000, Publisher="Altium Limited", Revision="July-2002: Re-released for DXP Platform."
H1 H2 H3 H4 H5 H6 H7 H8 H9: library part PAD_HOLD
J1: library part JP3, "WR-PHD 2.54 mm Angled Socket Header", Manufacturer="W¨¹rth Elektronik eiSos GmbH", partNo=613003143121, ComponentLink1 Description=Manufacturer, ComponentLink1URL=http://www.we-online.com, ComponentLink2 Description=Datasheet, ComponentLink2URL=http://katalog.we-online.de/em/datasheet/6130xx143121.pdf, Created by="Karrer Zheng", Created Date="29 March 2013", NoPins=03
J2: library part JP9, "WR-PHD 2.54 mm Angled Socket Header", Manufacturer="W¨¹rth Elektronik eiSos GmbH", partNo=613009143121, ComponentLink1 Description=Manufacturer, ComponentLink1URL=http://www.we-online.com, ComponentLink2 Description=Datasheet, ComponentLink2URL=http://katalog.we-online.de/em/datasheet/6130xx143121.pdf, Created by="Karrer Zheng", Created Date="29 March 2013", NoPins=09
L1: library part INDUCTOR, "SRP7050TA-150M"
R1 R2 R3 R4 R5 R6 R7 R8 R9 R10 R11 R12 R13 R14 R15 R16 R17 R18 R19 R20 R21 R22: library part Res-SMD, "0603", Manufacturer="Generic Components", Class=Passive, Published=08/06/2000, Publisher="Altium Hobart Technology Centre"
R23: library part Res-SMD, "ERA-3AEB3241V", Manufacturer="Generic Components", Class=Passive, Published=08/06/2000, Publisher="Altium Hobart Technology Centre"
U1: "IC CMOS 4 CIRCUIT 16SSOP", Supplier Part Number 1=595-OPA4340UA/2K5, Supplier 1=Mouser
U2 U3 U5: "IC SW SPST-NOX8 11.5OHM 24TSSOP"
U4: library part REF19xx, "REF1941AIDDCT"
U6: library part ADS8327, "IC ADC 16BIT SAR 16TSSOP", Supplier Part Number 1=595-ADS8327IPW, Supplier 1=Mouser
U7: library part TPS543X, "8SOP"
U8: "IC REG LINEAR 3.3V 1.5A SOT223-6"
U9: "CMOS Voltage Converters", Creator="Nguyen Ba Bien"

## Free pads (board coordinates)
  round 6 hole 3.3: 1(42.5,2.1)

## Via types
v1: diameter 0.6, hole 0.3, L1_TOP to L4_BOT, tented both sides, 1045 vias
v2: diameter 0.6, hole 0.3, L1_TOP to L4_BOT, 270 vias

## Nets (pads, with @x,y where several pads share a name; then routed paths per layer and width w, separated by ;. In a path a pad name is that pad's centre, name@x,y a point inside that pad or via, vN(x,y) a via of type N, cw(c..) or ccw(c..) an arc to the next point about the centre after c; other vN are vias at no path point)
0R_ADC_IN: D1.1 D1.3 J2.9 R7.1 R18.1 | length 10
  L1_TOP w0.61: R18.1@72.138,72.39 D1.3@72.138,68.127 D1.1@72.138,66.227 72.283,66.081 72.745,66.081 74.651,64.175 J2.9@75.095,64.175
12V_EXP: C2.2 C14.2 C23.2 C34.2 C36.1 J2.1 JP1.1 U2.2 U3.2 U5.2 U7.7 | length 63
  L1_TOP w0.381: C23.2@52.632,36.076 v1(52.632,34.881) 53.35,34.163 55.072,34.163 55.295,34.386 U5.2@55.295,36.281 ; C14.2@52.632,50.476 v1(52.632,49.631) 52.632,48.786 52.855,48.563 55.072,48.563 55.295,48.786 U3.2@55.295,50.681 ; C2.2@52.632,64.876 v1(52.632,64.031) 52.632,63.186 52.855,62.963 55.072,62.963 55.295,63.186 U2.2@55.295,65.081
  L1_TOP w1.016: C34.2@11.049,19.181 U7.7@13.832,19.181
  L1_TOP w1.524: C34.2@11.049,19.181 11.049,24.365 12.192,25.508 C36.1@14.422,25.508
  L3_SIGNAL w0.61: v1(52.632,34.881) v1(52.632,49.631) v1(52.632,64.031)
  L4_BOT w0.61: 52.632,31.826 v1(52.632,34.881)
  other v1: 13.716,30.353 14.478,30.353 15.24,30.353 16.002,30.353 74.007,30.48 74.803,30.48 75.565,30.48 14.502,31.149 15.24,31.149 16.002,31.149 13.716,31.242 13.716,32.004 14.502,32.004 15.24,32.004 16.002,32.004 74.007,32.004 74.803,32.004 75.565,32.004
+3.3: C9.2 C10.2 C18.2 C19.2 C27.2 C28.2 C41.2 C43.1 R1.2 R6.2 R9.2 R10.2 R14.2 R15.2 R19.2 R20.2 R21.2 U1.4 U4.3 U4.4 U6.1 U6.16 U8.4 U8.5 | length 151
  L1_TOP w0.33: U6.16@42.102,13.6 C27.2@42.102,12.192 v1(42.102,11.557) 42.177,11.557 42.666,11.068 50.007,11.068 50.292,11.353 C28.2@50.292,12.192 50.292,12.242 48.934,13.6 U6.1@47.802,13.6
  L1_TOP w0.381: 51.748,54.924 v1(51.748,57.404) ; 51.765,40.524 v1(51.765,43.004) ; 51.765,69.324 v1(51.765,71.804) ; C9.2@54.575,25.654 56.19,25.654 56.625,25.219 U1.4@56.625,23.381
  L1_TOP w0.4: R14.2@50.898,40.524 51.765,40.524 R15.2@52.632,40.524 ; R9.2@50.898,54.924 51.748,54.924 52.355,54.924 52.482,54.797 R10.2@52.632,54.797 ; R1.2@50.898,69.324 51.765,69.324 R6.2@52.632,69.324
  L1_TOP w0.61: C43.1@37.958,27.281 37.958,29.218 38.965,30.226 47.11,30.226 v1(51.765,34.881) ; 38.536,25.771 38.653,25.654 41.694,25.654 42.367,24.981 R21.2@42.367,23.677 R20.2@42.367,21.699 42.367,20.315 ; v1(42.102,25.246) v1(42.102,27.432) ; R19.2@42.367,19.812 42.367,20.315 ; v1(42.982,20.315) 42.403,20.315 42.385,20.297 42.367,20.315 ; v1(51.054,20.315) C18.2@51.054,19.68 U4.3@49.402,19.68 U4.4@49.402,22.23 49.402,22.42 49.407,22.425 50.697,22.425 51.054,22.782 C19.2@51.054,23.826 ; C9.2@54.575,25.654 C10.2@54.575,27.432 v1(55.172,27.432)
  L1_TOP w1.524: 38.536,20.201 38.536,25.771 C43.1@38.536,27.686
  L3_SIGNAL w0.33: v1(42.102,11.557) v1(42.102,25.246)
  L3_SIGNAL w0.61: v1(51.765,34.881) v1(51.765,43.004) v1(51.765,71.804)
  L4_BOT w0.381: v1(42.102,27.432) v1(55.172,27.432)
  L4_BOT w0.61: v1(42.982,20.315) v1(51.054,20.315)
+5: C35.2 C37.1 C40.2 C42.1 C46.1 JP1.2 L1.2 R22.2 U8.1 U8.2 U9.8 | length 35
  L1_TOP w0.61: C35.2@22.86,13.932 R22.2@22.86,16.11
  L1_TOP w0.762: v1(22.86,26.344) U9.8@25.435,26.344
  L1_TOP w0.889: C35.2@22.86,13.881 v1(22.86,11.43) 22.86,10.509 23.355,10.014 C37.1@23.419,10.014 ; v1(22.86,26.344) 22.86,28.983 C46.1@22.987,29.11
  L1_TOP w1.524: C42.1@38.536,9.516 38.536,15.981 38.536,16.84
  L4_BOT w0.889: v1(22.86,11.43) v1(22.86,12.065) v1(22.86,12.656) v1(22.86,27.432)
  other v1: 22.86,26.924
-5: C3.2 C15.2 C24.2 C48.2 U2.21 U3.21 U5.21 U9.5 | length 106.9
  L1_TOP w0.381: C24.2@49.164,42.124 v1(49.164,42.926) 49.164,45.222 50.108,46.166 55.86,46.166 56.595,45.431 U5.21@56.595,41.919 ; C15.2@49.164,56.524 v1(49.164,57.404) 49.164,59.622 50.108,60.566 55.86,60.566 56.595,59.831 U3.21@56.595,56.319 ; C3.2@49.164,70.924 v1(49.164,71.882) 49.164,74.022 50.108,74.966 55.86,74.966 56.595,74.231 U2.21@56.595,70.719
  L1_TOP w0.61: C48.2@29.245,29.11 29.245,30.139 31.11,32.004 46.287,32.004 v1(49.164,34.881)
  L1_TOP w0.762: U9.5@29.245,26.344 C48.2@29.245,29.11
  L3_SIGNAL w0.61: v1(49.164,34.881) v1(49.164,42.926) v1(49.164,57.404) v1(49.164,71.882)
ADC_CONVST: D2.3 J2.8 R19.1 TP11.1 U6.9 | length 97.4
  L1_TOP w0.33: R19.1@40.767,19.812 40.767,18.5 41.117,18.15 U6.9@42.102,18.15 v1(43.152,18.15)
  L1_TOP w0.61: v1(72.138,63.769) D2.3@72.138,64.504 ; D2.3@72.163,64.504 73.64,63.027 74.994,63.027 J2.8@75.095,62.925
  L3_SIGNAL w0.381: v1(72.138,13.462) v1(72.138,63.769)
  L4_BOT w0.33: v1(43.152,18.15) 47.84,13.462 v1(72.138,13.462)
  L4_BOT w0.381: v1(64.77,65.278) 66.279,63.769 v1(72.138,63.769)
ADC_CS: D2.1 J2.7 R21.1 TP10.1 U6.11 | length 89.7
  L1_TOP w0.254: R21.1@40.767,23.677 v1(40.767,24.312)
  L1_TOP w0.33: v1(40.767,16.85) U6.11@42.102,16.85
  L1_TOP w0.381: TP10.1@64.77,60.452 64.77,62.573 v1(64.801,62.604)
  L1_TOP w0.61: v1(70.113,62.604) D2.1@72.138,62.604 72.163,62.604 73.092,61.675 J2.7@75.095,61.675
  L3_SIGNAL w0.33: v1(40.767,16.85) v1(40.767,24.312)
  L3_SIGNAL w0.381: v1(69.723,24.312) 69.723,62.152 70.113,62.542 v1(70.113,62.604)
  L4_BOT w0.33: v1(40.767,24.312) v1(69.723,24.312)
  L4_BOT w0.381: v1(64.801,62.604) v1(70.113,62.604)
ADC_EOC: R18.2 R20.1 U6.10 | length 88.6
  L1_TOP w0.33: v1(39.878,17.5) U6.10@42.102,17.5 ; v1(39.878,21.699) R20.1@40.767,21.699 ; v1@68.072,72.39 v1(68.199,72.39) R18.2@70.322,72.39
  L3_SIGNAL w0.33: v1(39.878,17.5) v1(39.878,21.699) ; v1(68.199,21.717) v1(68.199,72.39)
  L4_BOT w0.33: v1(39.878,21.699) 39.887,21.708 68.19,21.708 v1(68.199,21.717)
ADC_IN: C1.1 R7.2 R16.2 TP1.1 U1.10 U1.11 | length 82.3
  L1_TOP w0.381: C1.1@54.085,16.002 54.135,16.002 54.72,16.587 U1.10@54.72,18.275 U1.11@55.355,18.275 ; TP1.1@64.77,70.104 v1(68.961,70.104) R7.2@70.322,70.104
  L1_TOP w0.61: R16.2@52.197,15.965 52.216,15.984 53.141,15.984 ; v1(53.141,15.329) 53.141,15.984 ; C1.1@54.085,16.002 54.067,15.984 53.141,15.984
  L3_SIGNAL w0.381: v1(68.961,15.049) v1(68.961,70.104)
  L4_BOT w0.381: v1(53.141,15.329) 53.203,15.329 53.483,15.049 v1(68.961,15.049)